# Altium PCB DartBoard.PcbDoc
Units mm, origin at the board's own origin, x right, y up, seen from the top; angles counter-clockwise.
Board outline 42.5 x 45 mm, 2 copper layers (Top Layer, Bottom Layer); 59 components, 37 nets, 242 pads, 103 vias.
Unrouted connection lines stored in the file: 95.
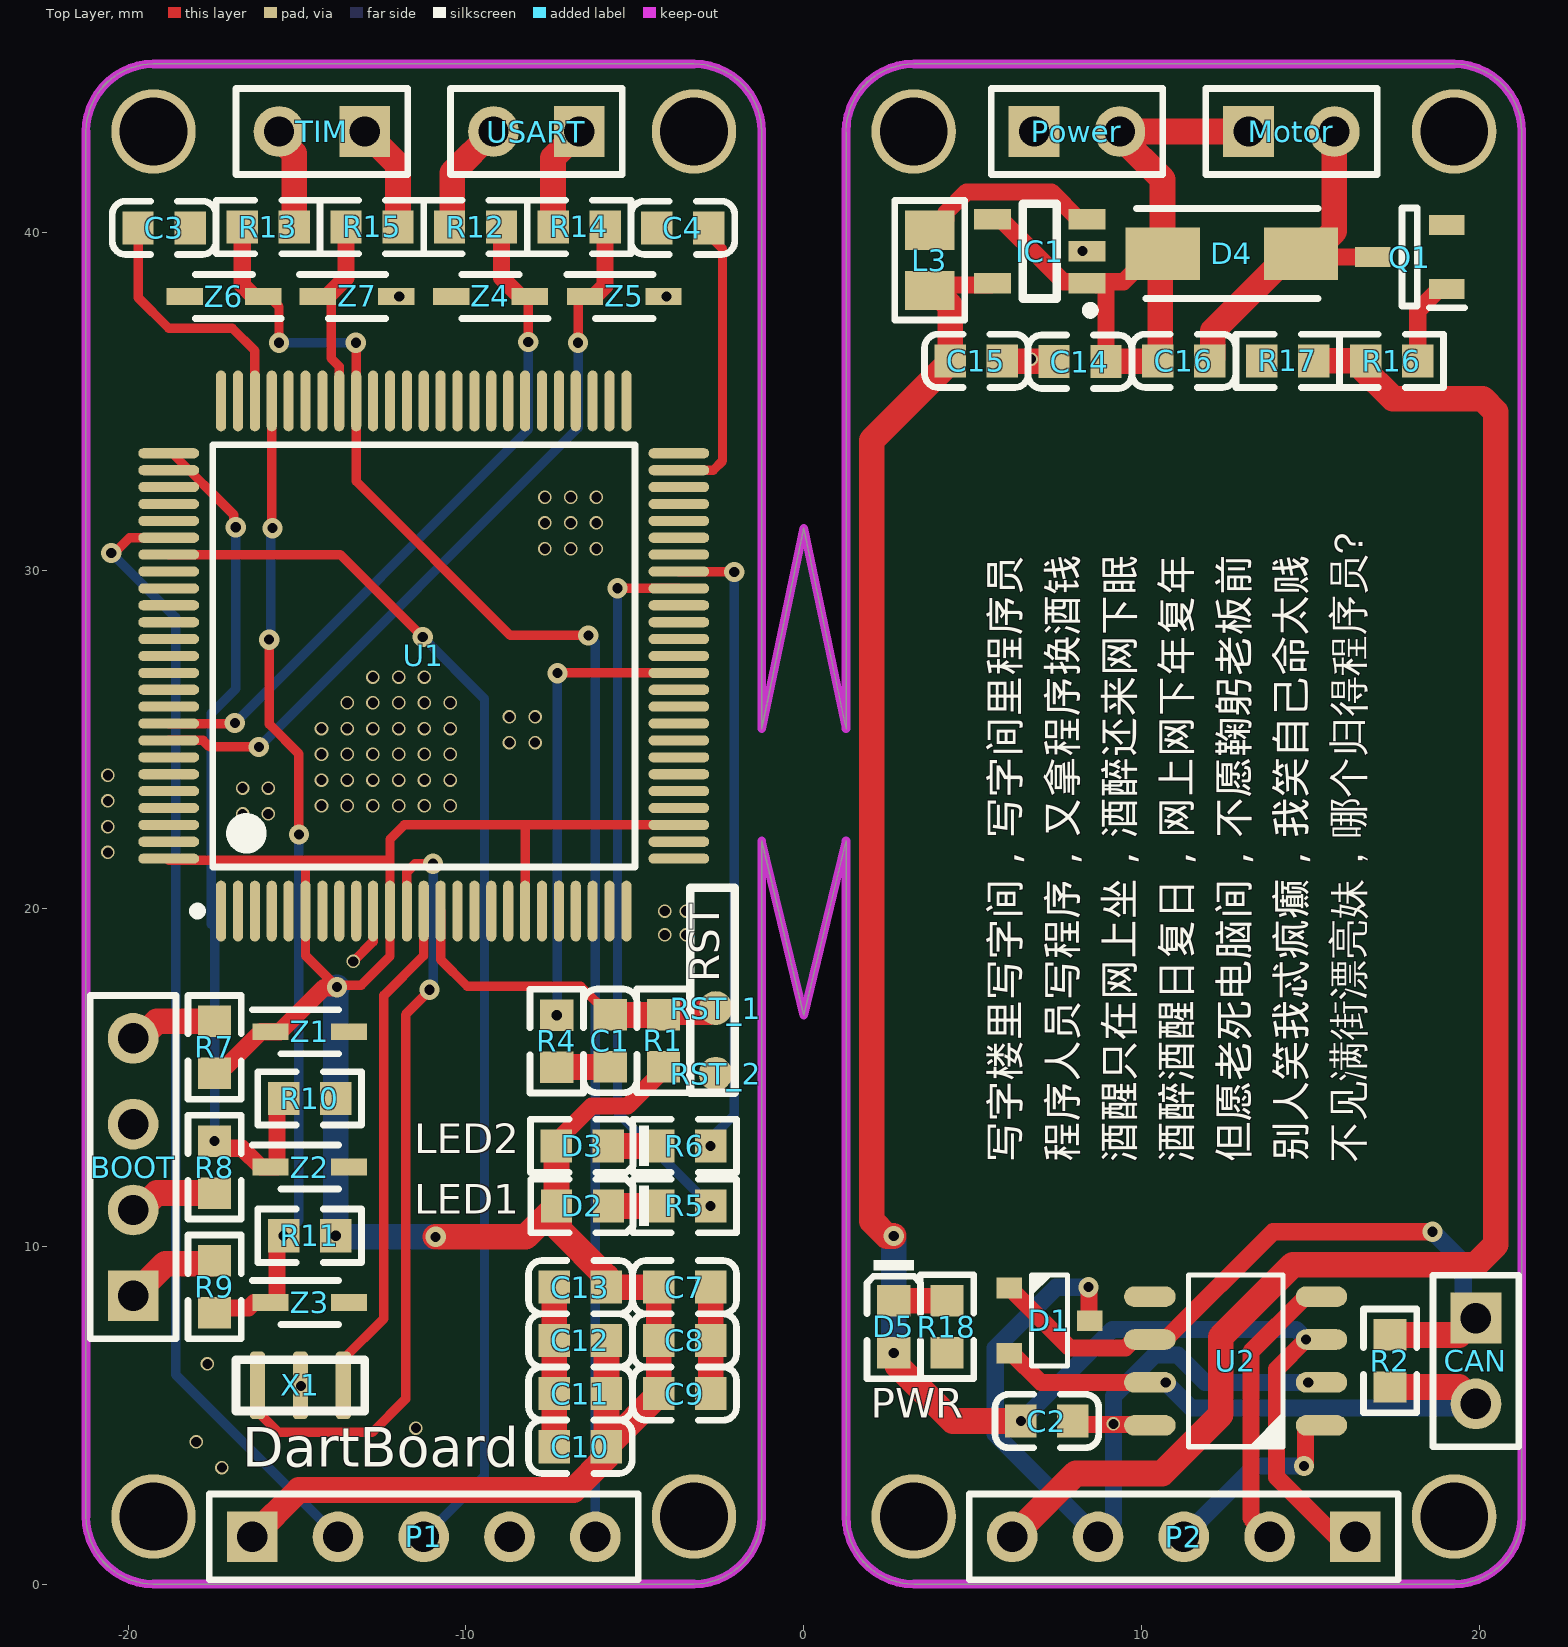
[diagram p0: Top Layer view]
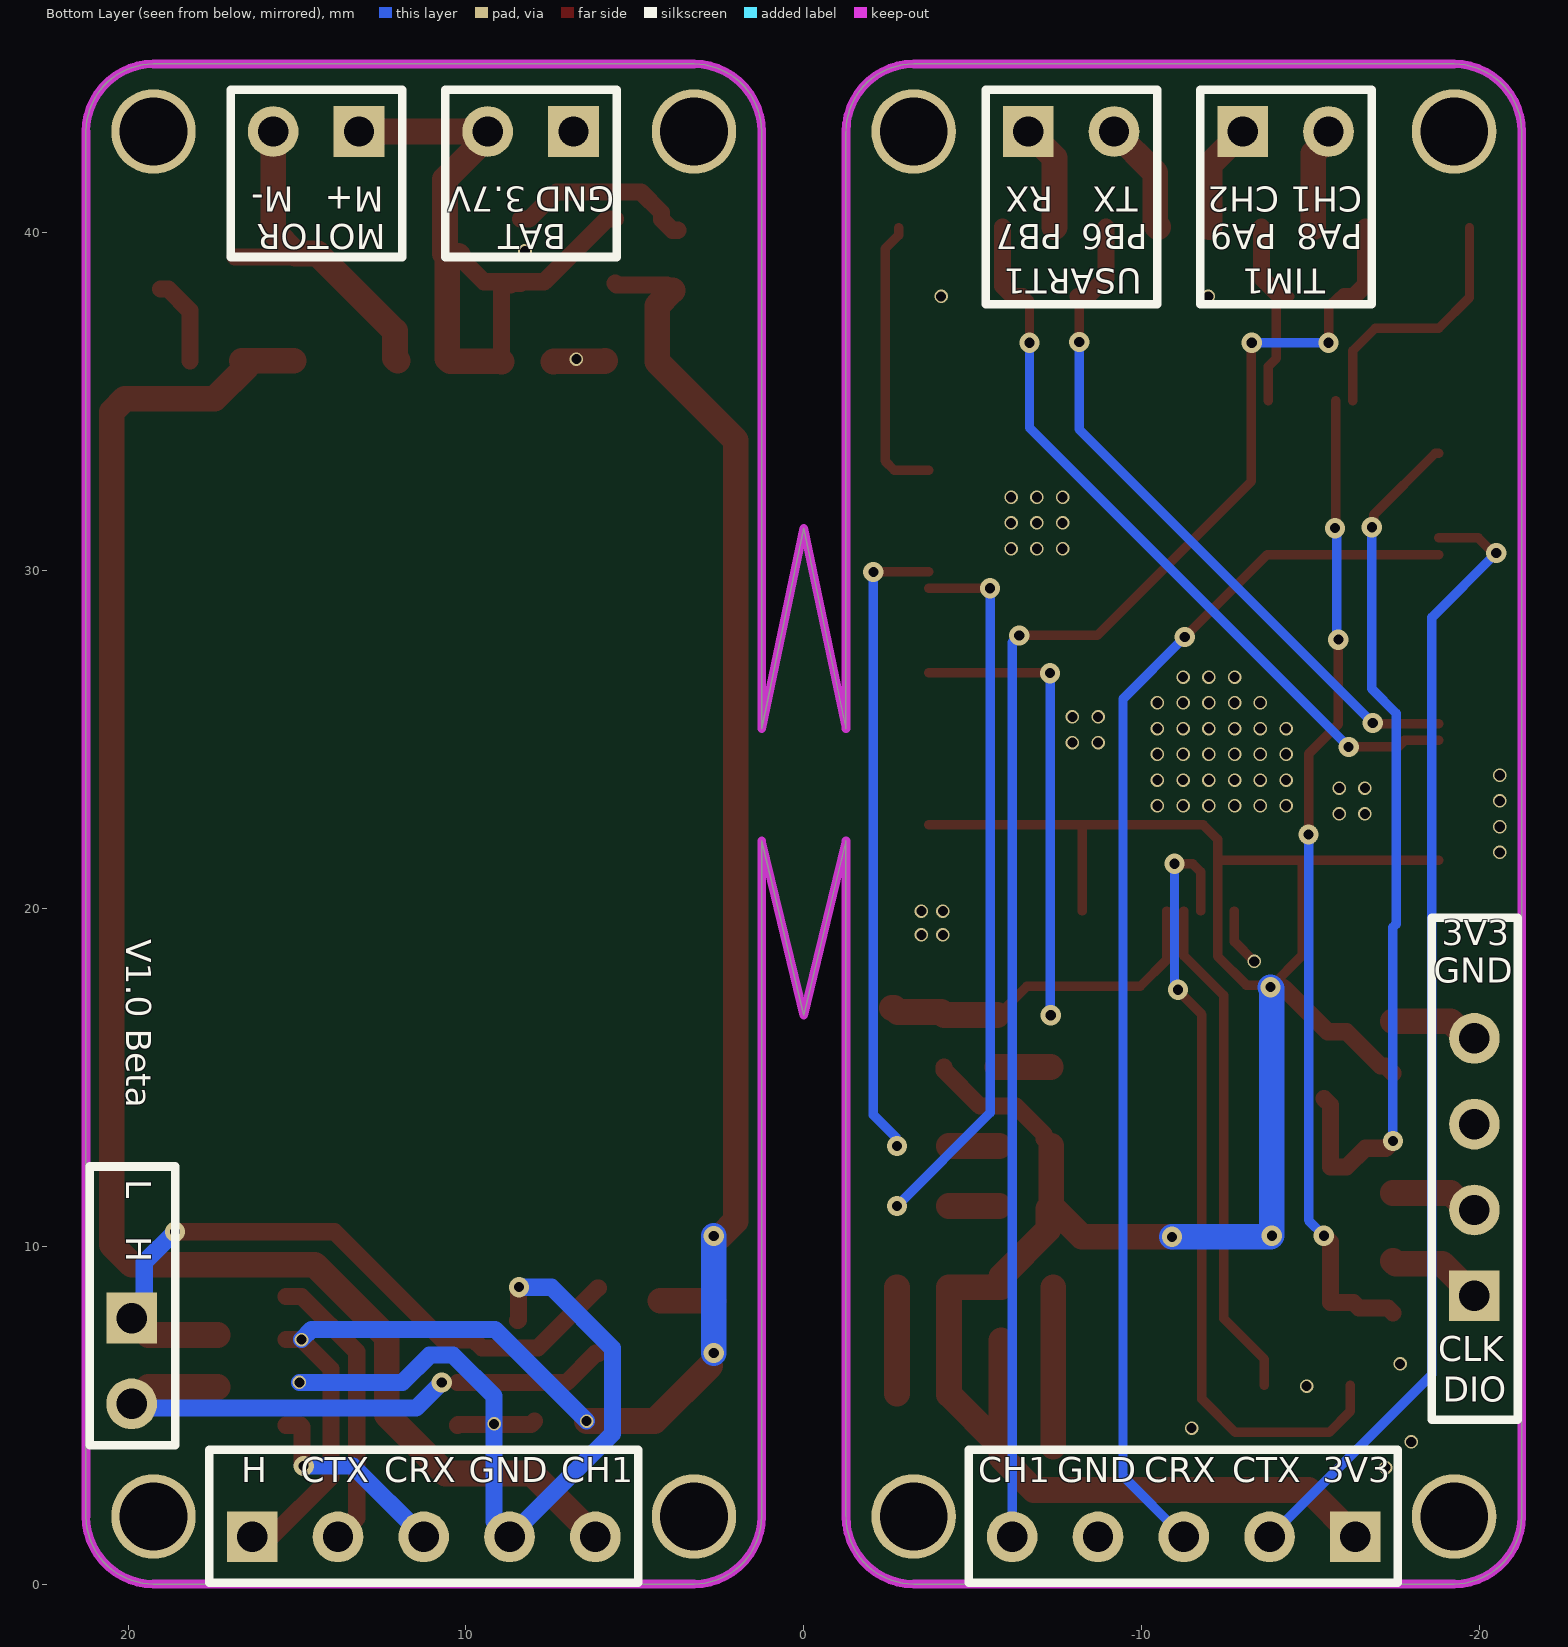
[diagram p1: Bottom Layer view, seen from below]
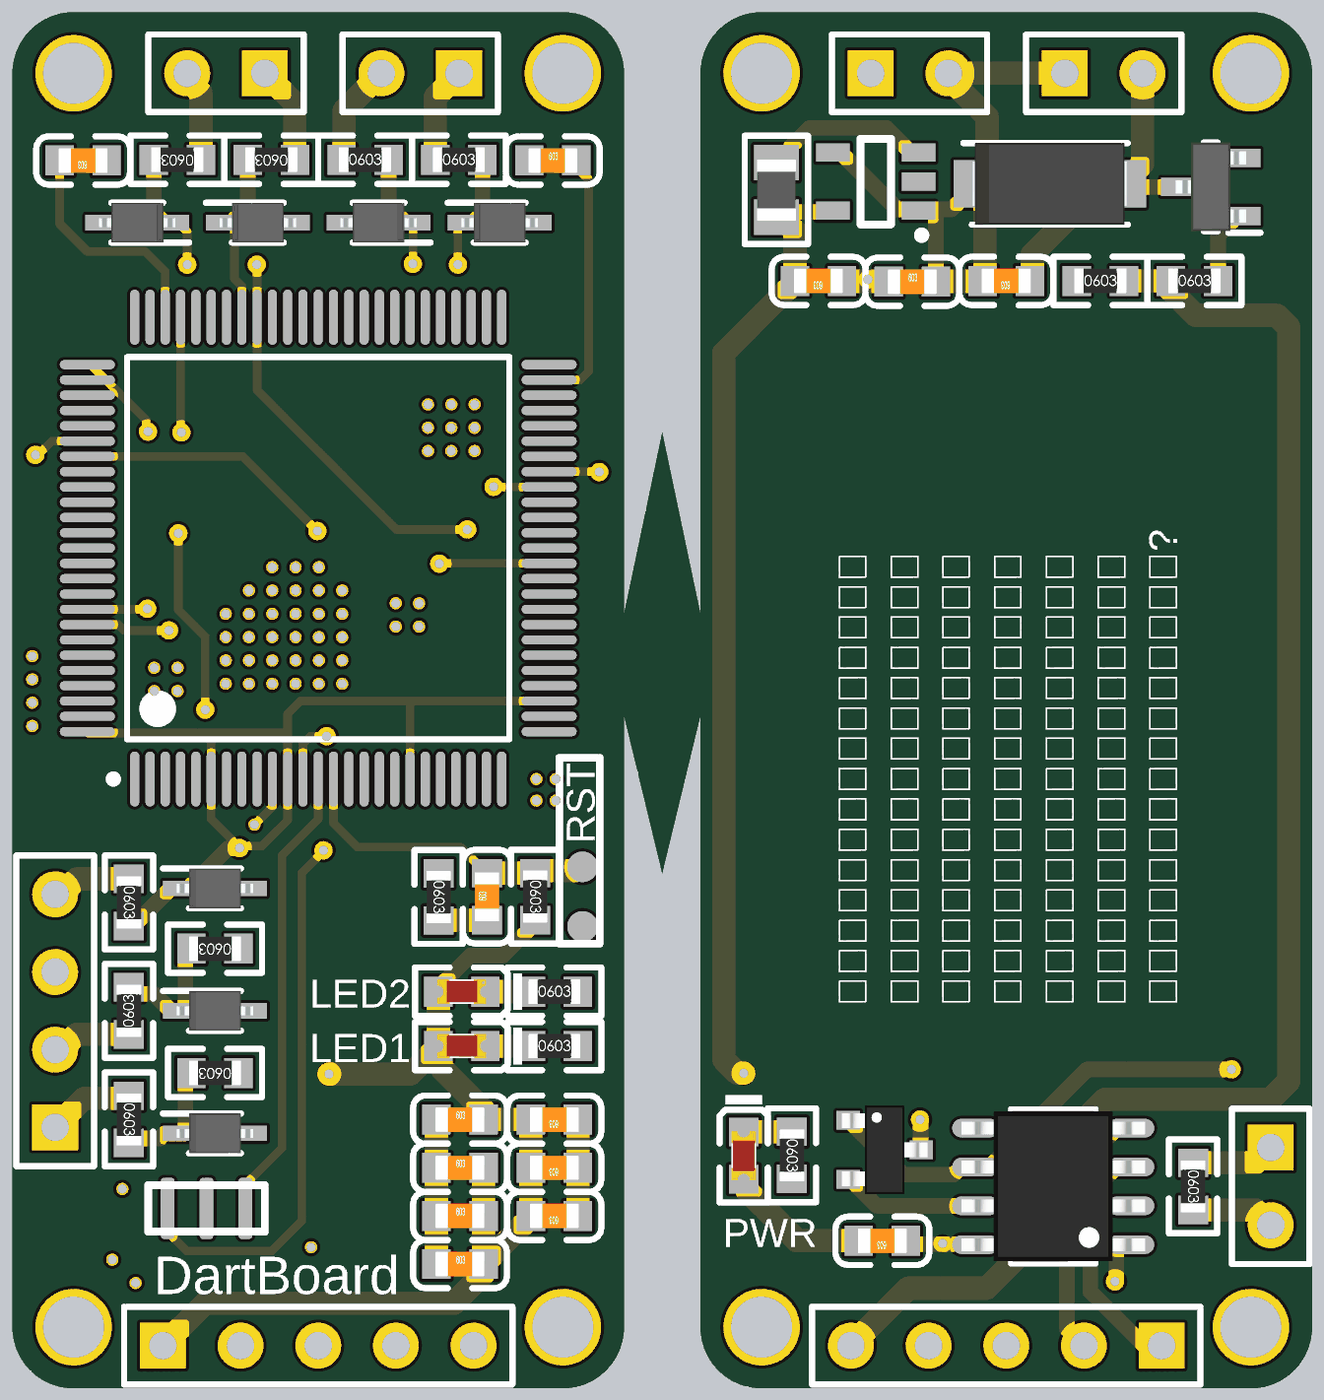
[diagram p2: 3D render of the assembled board from above, using the file's embedded part models]

## Layer stack, top to bottom
Top Solder: solder mask 0.0102, Solder Resist, Dk 3.5
Top Layer: signal copper 0.0356
Dielectric 1: dielectric 0.32, FR-4, Dk 4.8
Bottom Layer: signal copper 0.0356
Bottom Solder: solder mask 0.0102, Solder Resist, Dk 3.5

## Board outline
-21.25,2 ccw(c-19.25,2) -19.25,0 -3.25,0 ccw(c-3.25,2) -1.25,2 -1.25,22 0,16.839 1.25,22 1.25,2 ccw(c3.25,2) 3.25,0 19.25,0 ccw(c19.25,2) 21.25,2 21.25,43 ccw(c19.25,43) 19.25,45 3.25,45 ccw(c3.25,43) 1.25,43 1.25,25.326 0,31.259 -1.25,25.326 -1.25,43 ccw(c-3.25,43) -3.25,45 -19.25,45 ccw(c-19.25,43) -21.25,43

## Design rules (kind name [scope] priority, off if disabled: settings)
Clearance [All] p1: gap=0.127 ignorepadtopadclearanceinfootprint=FALSE except(0: Arc-Hole Track-Hole SMDPad-Hole THPad-Hole Via-Hole Fill-Hole Poly-Hole Region-Hole Text-Hole)
PlaneConnect [All] p1: planeconnectstyle=Direct reliefexpansion=0.508 reliefentries=4 reliefconductorwidth=0.254 reliefairgap=0.254
PolygonConnect [All] p1: connectstyle=Direct reliefconductorwidth=0.254 reliefentries=4 polygonreliefangle="90 Angle" airgapwidth=0.254
RoutingVias [All] p1: holewidth=0.3 width=0.6 viastyle="Through Hole" minholewidth=0.3 minwidth=0.6 maxholewidth=0.3 maxwidth=0.6
SolderMaskExpansion [All] p1: expansion=0.102
Width [All] p1: maxlimit=2.54 minlimit=0.254 preferedwidth=0.279
29 further rules are at their usual default settings.

## Components (designator, comment, footprint, x,y, rotation, side; value= is the part's Value field where it differs from the comment)
BOOT "Header 4" HDR1X4 -19.853,8.534 r90 top
C1 "100nF (104) 10% 50V" 0603_C -5.731,16.078 r90 top
C2 "100nF (104) 10% 50V" 0603_C 7.198,4.826 r180 top
C3 "2.2uF (225) 10% 16V" 0603_C -18.938,40.149 r180 top
C4 "2.2uF (225) 10% 16V" 0603_C -3.579,40.149 r0 top
C7 "100nF (104) 10% 50V" 0603_C -3.527,8.788 r180 top
C8 "100nF (104) 10% 50V" 0603_C -3.527,7.214 r180 top
C9 "100nF (104) 10% 50V" 0603_C -3.527,5.639 r180 top
C10 "100nF (104) 10% 50V" 0603_C -6.613,4.064 r0 top
C11 "100nF (104) 10% 50V" 0603_C -6.613,5.639 r0 top
C12 "100nF (104) 10% 50V" 0603_C -6.613,7.214 r0 top
C13 "100nF (104) 10% 50V" 0603_C -6.613,8.788 r0 top
C14 "4.7uF (475) 10% 16V" 0603_C 8.177,36.186 r0 top
C15 "10uF (106) 10% 10V" 0603_C 5.111,36.212 r180 top
C16 "10uF (106) 10% 10V" 0603_C 11.25,36.212 r180 top
CAN "Header 2" HDR1X2 19.898,7.874 r270 top
D1 "PESD2CAN" SOT-23-3 7.274,7.798 r180 top
D2 "红灯 0603" 0603_LED_S1 -6.551,11.193 r180 top
D3 "绿灯 0603" 0603_LED_S1 -6.554,12.971 r180 top
D4 "SS14-E3_61T" DIOM5127X229N 12.672,39.387 r0 top
D5 "红灯 0603" 0603_LED_S1 2.665,7.611 r270 top
IC1 "XM5062_33" SOT-23-5 6.983,39.457 r0 top
L3 "2.2uH ±10%" 0805_L 3.732,39.187 r270 top
Motor "Header 2" HDR1X2 13.167,43 r0 top
P1 "Header 5" HDR1X5 -16.33,1.397 r0 top
P2 "Header 5" HDR1X5 16.33,1.397 r180 top
Power "Header 2" HDR1X2 6.817,43 r0 top
Q1 "SI2302DS" SOT95P230X110-3N 17.938,39.285 r180 top
R1 "10KΩ (1002) ±1%" 0603_R -4.156,16.078 r270 top
R2 "120Ω (1200) ±1%" 0603_R 17.358,6.604 r270 top
R4 "10KΩ (1002) ±1%" 0603_R -7.313,16.069 r270 top
R5 "4.7KΩ (4701) ±1%" 0603_R -3.527,11.193 r0 top
R6 "4.7KΩ (4701) ±1%" 0603_R -3.527,12.971 r0 top
R7 "0Ω (0R0) ±1%" 0603_R -17.44,15.889 r270 top
R8 "100Ω (1000) ±1%" 0603_R -17.44,12.344 r90 top
R9 "100Ω (1000) ±1%" 0603_R -17.44,8.796 r270 top
R10 "10KΩ (1002) ±1%" 0603_R -14.627,14.376 r180 top
R11 "10KΩ (1002) ±1%" 0603_R -14.627,10.312 r180 top
R12 "100Ω (1000) ±1%" 0603_R -9.718,40.174 r0 top
R13 "100Ω (1000) ±1%" 0603_R -15.855,40.174 r180 top
R14 "100Ω (1000) ±1%" 0603_R -6.653,40.174 r0 top
R15 "100Ω (1000) ±1%" 0603_R -12.782,40.174 r180 top
R16 "22Ω (22R0) ±1%" 0603_R 17.405,36.212 r0 top
R17 "10KΩ (1002) ±1%" 0603_R 14.328,36.212 r0 top
R18 "4.7KΩ (4701) ±1%" 0603_R 4.24,7.62 r270 top
RST_1 "TestPoint" TestPoint -2.606,17.053 r90 top
RST_2 "TestPoint" TestPoint -2.606,15.104 r90 top
TIM "Header 2" HDR1X2 -12.995,43 r180 top
U1 "STM32F427VIT6" STM-LQFP100_N -11.25,27.474 r90 top
U2 "SN65HVD230DR" SOIC_8 12.786,6.604 r90 top
USART "Header 2" HDR1X2 -6.645,43 r180 top
X1 "12MHz" CSTCE_G(A)村田晶振 -14.903,5.884 r180 top
Z1 "BZT52C3V9S-7-F" SOD2513X110N -14.627,16.349 r0 top
Z2 "BZT52C3V9S-7-F" SOD2513X110N -14.627,12.344 r0 top
Z3 "BZT52C3V9S-7-F" SOD2513X110N -14.627,8.336 r0 top
Z4 "BZT52C3V9S-7-F" SOD2513X110N -9.275,38.117 r180 top
Z5 "BZT52C3V9S-7-F" SOD2513X110N -5.317,38.117 r0 top
Z6 "BZT52C3V9S-7-F" SOD2513X110N -17.166,38.117 r180 top
Z7 "BZT52C3V9S-7-F" SOD2513X110N -13.225,38.117 r0 top

## Footprints (in the part's own frame and the unit in brackets; to place one, negate y for a bottom-side part, rotate by r counter-clockwise, add the part's x,y. Pads: shape width x height; smd on the part's side, far side on the other; paste and mask are expansions set on the pad)
0603_C [mm]
  rect 0.93x0.98 smd: 1(-0.77,0) 2(0.77,0)
  silkscreen extent -1.53,-0.79 1.54,0.79, body extent -0.8,-0.4 0.8,0.4, height 0.3
0603_LED_S1 [mm]
  rect 0.93x0.98 smd: A(0.77,0) K(-0.77,0)
  silkscreen extent -1.98,-0.79 1.54,0.79, body extent -0.8,-0.4 0.8,0.4, height 0.6
0603_R [mm]
  rect 0.93x0.98 smd: 1(-0.77,0) 2(0.77,0)
  silkscreen extent -1.53,-0.79 1.54,0.79, body extent -0.85,-0.4 0.85,0.4, height 0.56
0805_L [mm]
  rect 1.16x1.47 smd: 1(-0.89,0) 2(0.89,0)
  silkscreen extent -1.77,-1.04 1.77,1.03, body extent -1.02,-0.64 1.03,0.64, height 0.6
CSTCE_G(A)村田晶振 [mm]
  rrect50% 0.45x2 smd: 1(1.27,0) 2(0,0) 3(-1.27,0)
  silkscreen extent -1.91,-0.76 1.91,0.76, body extent -1.9,-0.8 1.9,0.8, height 1
DIOM5127X229N [mm]
  rect 2.2x1.55 smd: 1(-2.05,0) 2(2.05,0)
  silkscreen extent -2.83,-1.33 2.55,1.33, body extent -2.55,-1.33 2.55,1.33, height 2.29
HDR1X2 [mm] "Connector; Header; 2 Position"
  rect 1.5x1.5 hole 0.9: 1(0,0)
  round 1.5 hole 0.9: 2(2.54,0)
  silkscreen extent -1.27,-1.27 3.81,1.27
HDR1X4 [mm] "Connector; Header; 4 Position"
  rect 1.5x1.5 hole 0.9: 1(0,0)
  round 1.5 hole 0.9: 2(2.54,0) 3(5.08,0) 4(7.62,0)
  silkscreen extent -1.27,-1.27 8.89,1.27
HDR1X5 [mm] "Connector; Header; 5 Position"
  rect 1.5x1.5 hole 0.9: 1(0,0)
  round 1.5 hole 0.9: 2(2.54,0) 3(5.08,0) 4(7.62,0) 5(10.16,0)
  silkscreen extent -1.27,-1.27 11.43,1.27
SOD2513X110N [mm]
  rect 1.075x0.5 smd: 1(-1.162,0) 2(1.162,0)
  silkscreen extent -1.7,-0.65 0.85,0.65, body extent -1.25,-0.65 1.25,0.65, height 1.1
SOIC_8 [mil]
  oval 24x60 smd: 1(-75,-100.02) 2(-25,-100.02) 3(25,-100.02) 4(75,-100.02) 5(75,99.98) 6(25,99.98) 7(-25,99.98) 8(-75,99.98)
  silkscreen extent -100,-55 100,55, body extent -96,-118 96,118, height 69
SOT95P230X110-3N [mm]
  rect 1.05x0.6 smd: 1(-1.1,0.95) 2(-1.1,-0.95) 3(1.1,0)
  silkscreen extent -1.63,-1.45 0.23,1.5, body extent -1.15,-1.45 1.15,1.45, height 1.1
SOT-23-3 [mil]
  rect 30x24 smd: 1(47,-38) 2(47,38) 3(-47,0)
  silkscreen extent -21,-53 21,53, body extent -55,-57 55,57, height 51
SOT-23-5 [mm]
  rect 1.1x0.6 smd: 1(1.4,-0.95) 2(1.4,0) 3(1.4,0.95) 4(-1.4,0.95) 5(-1.4,-0.95)
  silkscreen extent -0.5,-1.87 1.63,1.4
STM-LQFP100_N [mm] "Thin QFP, 100-Leads, Body 14x14mm, Pitch 0.5mm, IPC Medium Density"
  oval 1.8x0.3 smd: 1(-7.55,6) 2(-7.55,5.5) 3(-7.55,5) 4(-7.55,4.5) 5(-7.55,4) 6(-7.55,3.5) 7(-7.55,3) 8(-7.55,2.5) 9(-7.55,2) 10(-7.55,1.5) 11(-7.55,1) 12(-7.55,0.5) 13(-7.55,0) 14(-7.55,-0.5) 15(-7.55,-1) 16(-7.55,-1.5) 17(-7.55,-2) 18(-7.55,-2.5) 19(-7.55,-3) 20(-7.55,-3.5) 21(-7.55,-4) 22(-7.55,-4.5) 23(-7.55,-5) 24(-7.55,-5.5) 25(-7.55,-6) 51(7.55,-6) 52(7.55,-5.5) 53(7.55,-5) 54(7.55,-4.5) 55(7.55,-4) 56(7.55,-3.5) 57(7.55,-3) 58(7.55,-2.5) 59(7.55,-2) 60(7.55,-1.5) 61(7.55,-1) 62(7.55,-0.5) 63(7.55,0) 64(7.55,0.5) 65(7.55,1) 66(7.55,1.5) 67(7.55,2) 68(7.55,2.5) 69(7.55,3) 70(7.55,3.5) 71(7.55,4) 72(7.55,4.5) 73(7.55,5) 74(7.55,5.5) 75(7.55,6)
  oval 0.3x1.8 smd: 26(-6,-7.55) 27(-5.5,-7.55) 28(-5,-7.55) 29(-4.5,-7.55) 30(-4,-7.55) 31(-3.5,-7.55) 32(-3,-7.55) 33(-2.5,-7.55) 34(-2,-7.55) 35(-1.5,-7.55) 36(-1,-7.55) 37(-0.5,-7.55) 38(0,-7.55) 39(0.5,-7.55) 40(1,-7.55) 41(1.5,-7.55) 42(2,-7.55) 43(2.5,-7.55) 44(3,-7.55) 45(3.5,-7.55) 46(4,-7.55) 47(4.5,-7.55) 48(5,-7.55) 49(5.5,-7.55) 50(6,-7.55) 76(6,7.55) 77(5.5,7.55) 78(5,7.55) 79(4.5,7.55) 80(4,7.55) 81(3.5,7.55) 82(3,7.55) 83(2.5,7.55) 84(2,7.55) 85(1.5,7.55) 86(1,7.55) 87(0.5,7.55) 88(0,7.55) 89(-0.5,7.55) 90(-1,7.55) 91(-1.5,7.55) 92(-2,7.55) 93(-2.5,7.55) 94(-3,7.55) 95(-3.5,7.55) 96(-4,7.55) 97(-4.5,7.55) 98(-5,7.55) 99(-5.5,7.55) 100(-6,7.55)
  silkscreen extent -7.67,-6.25 6.25,6.82, body extent -7,-7 7,7, height 1.6
TestPoint [mm]
  round 1 smd: 1(0,0)

## Part data
BOOT: "Header, 4-Pin", LatestRevisionDate=17-Jul-2002, LatestRevisionNote="Re-released for DXP Platform.", Publisher="Altium Limited"
C1 C2 C7 C8 C9 C10 C11 C12 C13: library part "0603 100nF (104) 10% 50V", "贴片电容", Package=0603, SuppliersPartNumber=C14663, ComponentLink1Description=供应商, ComponentLink1URL=http://www.szlcsc.com/product/details_15331.html, Supplier=LC
C3 C4: library part "0603 2.2uF (225) 10% 16V", "贴片电容", Package=0603, SuppliersPartNumber=C23630, ComponentLink1Description=供应商, ComponentLink1URL=http://www.szlcsc.com/product/details_24366.html, Supplier=LC
C14: library part "0603 4.7uF (475) 10% 16V", "贴片电容", Package=0603, SuppliersPartNumber=C19666, ComponentLink1Description=供应商, ComponentLink1URL=http://www.szlcsc.com/product/details_20375.html, Supplier=LC
C15 C16: library part "0603 10uF (106) 10% 10V", "贴片电容", Package=0603, SuppliersPartNumber=C19702, ComponentLink1Description=供应商, ComponentLink1URL=http://www.szlcsc.com/product/details_20411.html, Supplier=LC
CAN Motor Power TIM USART: "Header, 2-Pin", LatestRevisionDate=17-Jul-2002, LatestRevisionNote="Re-released for DXP Platform.", Publisher="Altium Limited"
D1: library part TVS_C2
D2 D5: library part "0603 红灯", "发光二极管", Package=0603, SuppliersPartNumber=C2286, ComponentLink1Description=供应商, ComponentLink1URL=http://www.szlcsc.com/product/details_2659.html, Supplier=LC
D3: library part "0603 绿灯", "发光二极管", Package=0603, SuppliersPartNumber=C72043, ComponentLink1Description=供应商, ComponentLink1URL=http://www.szlcsc.com/product/details_73152.html, Supplier=LC
D4: "Diode", Manufacturer_Name=Vishay, Manufacturer_Part_Number=SS14-E3/61T, Mouser Part Number=625-SS14-E3, RS Part Number=6387915P, Allied_Number=70217666, Allied Price/Stock=https://www.alliedelec.com/general-semiconductor-vishay-ss14-e3-61t/70217666/, Datasheet Link=http://docs-emea.rs-online.com/webdocs/0928/0900766b809284de.pdf, Height=2.29mm, Mouser Price/Stock=https://www.mouser.com/Search/Refine.aspx?Keyword=625-SS14-E3, RS Price/Stock=http://uk.rs-online.com/web/p/products/6387915P
IC1: library part 1-1393258-5, "Relay or Contactor", Manufacturer_Name="TE Connectivity", Datasheet Link=http://www.te.com/commerce/DocumentDelivery/DDEController?Action=showdoc&DocId=Data+Sheet%7FSR2M%7F1116%7Fpdf%7FEnglish%7FENG_DS_SR2M_1116.pdf%7F1-1393258-5, Height=25mm, Manufacturer_Part_Number=1-1393258-5
L3: library part "0805 2.2uH 10%", "贴片电感", Package=0805, SuppliersPartNumber=C1043, ComponentLink1Description=供应商, ComponentLink1URL=http://www.szlcsc.com/product/details_1395.html, Supplier=LC
P1 P2: "Header, 5-Pin", LatestRevisionDate=17-Jul-2002, LatestRevisionNote="Re-released for DXP Platform.", Publisher="Altium Limited"
Q1: "MOSFET (N-Channel)", Manufacturer_Name=Nexperia, Mouser Part Number=N/A, RS Part Number=7983053P, Datasheet Link=https://assets.nexperia.com/documents/data-sheet/SI2302DS.pdf, Height=1.1mm, Manufacturer_Part_Number=SI2302DS, Mouser Price/Stock=https://www.mouser.com/Search/Refine.aspx?Keyword=N%2FA, RS Price/Stock=http://uk.rs-online.com/web/p/products/7983053P
R1 R4 R10 R11 R17: library part "0603 10KΩ (1002) 1%", "贴片电阻", Package=0603, SuppliersPartNumber=C25804, ComponentLink1Description=供应商, ComponentLink1URL=http://www.szlcsc.com/product/details_26547.html, Supplier=LC
R2: library part "0603 120Ω (1200) 1%", "贴片电阻", Package=0603, SuppliersPartNumber=C22787, ComponentLink1Description=供应商, ComponentLink1URL=http://www.szlcsc.com/product/details_23514.html, Supplier=LC
R5 R6 R18: library part "0603 4.7KΩ (4701) 1%", "贴片电阻", Package=0603, SuppliersPartNumber=C23162, ComponentLink1Description=供应商, ComponentLink1URL=http://www.szlcsc.com/product/details_23889.html, Supplier=LC
R7: library part "0603 0Ω (0R0) 1%", "贴片电阻", Package=0603, SuppliersPartNumber=C21189, ComponentLink1Description=供应商, ComponentLink1URL=http://www.szlcsc.com/product/details_21903.html, Supplier=LC
R8 R9 R12 R13 R14 R15: library part "0603 100Ω (1000) 1%", "贴片电阻", Package=0603, SuppliersPartNumber=C22775, ComponentLink1Description=供应商, ComponentLink1URL=http://www.szlcsc.com/product/details_23502.html, Supplier=LC
R16: library part "0603 22Ω (22R0) 1%", "贴片电阻", Package=0603, SuppliersPartNumber=C23345, ComponentLink1Description=供应商, ComponentLink1URL=http://www.szlcsc.com/product/details_24078.html, Supplier=LC
U1: "ARM Cortex-M4 32-bit MCU+FPU, 210 DMIPS, 2048 kB Flash, 256 kB Internal RAM, 82 I/Os, 100-pin LQFP, -40 to 85 degC, Tray", I/Os (High Current)=82, Manufacturer=STMicroelectronics, Operating Frequency(F) (Processor speed) (MHz)=168, Supplier Part Number 1=497-14049-ND, Supply Voltage(Vcc) max (V)=3.6, Supply Voltage(Vcc) min (V)=1.8, ComponentLink1Description="Manufacturer URL", ComponentLink1URL=http://www.st.com/web/en/home.html, ComponentLink2Description=Datasheet, ComponentLink2URL=http://www.st.com/st-web-ui/static/active/en/resource/technical/document/datasheet/DM00071990.pdf, ComponentLink3Description="Package Specification", ComponentLink3URL=http://www.st.com/st-web-ui/static/active/en/resource/technical/document/data_brief/DM00071938.pdf, Core="ARM Cortex-M4", D/A Converter=2x12-bit, DatasheetVersion="Rev. 1", FLASH Size (Prog) (kB)=2048, Internal RAM Size (kB)=256, Mounting Technology="Surface Mount", PackageDescription="100-Pin Low Profile Quad Flat Package, 14 x 14 mm Body, 0.5 mm Pitch", PackageReference=LQFP100, PackageVersion="Rev. 1, 06/2013", Packing=Tray, PartNumber=STM32F427VIT6, Supplier 1=Digi-Key, Supplier 2=Farnell, Supplier 3=Newark, Supplier 4=Newark, Supplier 5=Mouser, Supplier Part Number 2=2333369, Supplier Part Number 3=99W9927, Supplier Part Number 4=66W7312, Supplier Part Number 5=511-STM32F427VIT6
U2: "CANоƬ"
X1: library part XTAL-3215
Z1 Z2 Z3 Z4 Z5 Z6 Z7: "Zener Diode", Manufacturer_Name="Diodes Inc.", Mouser Part Number=621-BZT52C3V9S-F, RS Part Number=7513761, Allied_Number=70437795, Allied Price/Stock=https://www.alliedelec.com/diodes-inc-bzt52c3v9s-7-f/70437795/, Datasheet Link=https://www.diodes.com/assets/Datasheets/ds30093.pdf, Height=1.1mm, Manufacturer_Part_Number=BZT52C3V9S-7-F, Mouser Price/Stock=https://www.mouser.com/Search/Refine.aspx?Keyword=621-BZT52C3V9S-F, RS Price/Stock=https://uk.rs-online.com/web/p/products/7513761

## Free pads (board coordinates)
  round 2.5 hole 2: 9(-19.25,2) 9(-19.25,43) 9(-3.25,2) 9(-3.25,43) 9(3.25,2) 9(3.25,43) 9(19.25,2) 9(19.25,43)

## Via types
v1: diameter 0.4, hole 0.3, Top Layer to Bottom Layer, 71 vias
v2: diameter 0.6, hole 0.3, Top Layer to Bottom Layer, 32 vias

## Nets (pads, with @x,y where several pads share a name; then routed paths per layer and width w, separated by ;. In a path a pad name is that pad's centre, name@x,y a point inside that pad or via, vN(x,y) a via of type N, cw(c..) or ccw(c..) an arc to the next point about the centre after c; other vN are vias at no path point)
BOOT0: U1.94
BOOT1: R4.1 U1.37 | length 13.7
  Top Layer w0.279: v2(-7.292,26.966) -7.284,26.974 U1.37
  Bottom Layer w0.279: v2(-7.313,16.839) -7.302,16.85 -7.302,26.956 v2(-7.292,26.966)
CAN1_H: CAN.2 D1.2 R2.2 U2.7 | length 16.8
  Top Layer w0.508: D1.2 6.157,6.833 7.02,5.969 U2.7
  Top Layer w0.762: R2.2 19.398,5.834 CAN.2
  Bottom Layer w0.508: v2(10.717,5.969) 11.479,5.207 19.771,5.207 CAN.2
CAN1_L: CAN.1 D1.1 R2.1 U2.6 | length 20.5
  Top Layer w0.508: D1.1 6.099,8.763 7.877,6.985 9.523,6.985 9.757,7.22 10.227,7.22 U2.6 10.704,7.239 13.895,10.431 v2(18.616,10.431)
  Top Layer w0.762: R2.1 19.398,7.374 CAN.1
  Bottom Layer w0.508: v2(18.616,10.431) 19.523,9.524 19.523,8.249 CAN.1
CAN1_RX(PD0): P1.2 P2.2 U1.81 U2.4 | length 42.3
  Top Layer w0.279: v2(-20.5,30.522) -20.413,30.522 -19.961,30.974 U1.81
  Top Layer w0.508: P2.2 13.236,1.951 13.236,6.876 14.869,8.509 U2.4
  Bottom Layer w0.279: v2(-20.5,30.522) -18.595,28.617 -18.595,6.202 P1.2
CAN1_TX(PD1): P1.3 P2.3 U1.82 U2.1 | length 42.8
  Top Layer w0.279: U1.82 -13.721,30.474 v2(-11.28,28.033)
  Top Layer w0.508: v2(14.806,3.496) 14.85,3.54 14.85,4.652 14.897,4.699 U2.1
  Bottom Layer w0.279: v2(-11.28,28.033) -9.451,26.204 -9.451,3.196 P1.3
  Bottom Layer w0.508: P2.3 13.349,3.496 v2(14.806,3.496)
GND: BOOT.3 C1.1 C2.1 C3.1 C4.1 C7.1 C8.1 C9.1 C10.1 C11.1 C12.1 C13.1 C14.1 C15.1 D1.3 IC1.2 P1.4 P2.4 Power.1 Q1.2 R4.2 R10.1 R17.1 R18.2 RST_2.1 U1.10 U1.27 U1.74 U1.99 U2.2 U2.8 X1.2 Z1.2 Z2.2 Z3.2 Z4.2 Z5.2 Z6.2 Z7.2 | length 37.4
  Top Layer w0.279: v1(-13.337,18.432) -12.75,19.019 U1.10
  Top Layer w0.508: C2.1 8.075,4.719 10.227,4.719 U2.8 ; v2(8.431,8.788) 8.448,8.771 8.448,7.818 D1.3
  Top Layer w0.762: C10.1 C11.1 C12.1 C13.1 ; R4.2 -7.309,15.304 -5.735,15.304 C1.1 ; C9.1 C8.1 C7.1 ; C15.1 5.894,36.199 7.394,36.199 C14.1
  Bottom Layer w0.508: v2(8.431,8.788) 7.471,8.788 5.666,6.983 5.666,4.441 P2.4 9.167,1.854 v1(9.167,4.741) 9.167,5.562 10.382,6.777 11.077,6.777 11.885,5.969 v1(14.933,5.969)
  other v1: -17.223,3.446 -17.985,4.208 -11.483,4.614 -14.887,5.859 -17.655,6.519 -4.117,19.219 -3.482,19.219 -4.117,19.924 -3.482,19.924 -20.602,21.657 -20.602,22.419 -16.614,22.8 -15.852,22.8 -14.277,23.04 -13.515,23.04 -12.753,23.04 -11.991,23.04 -11.229,23.04 -10.467,23.04 -20.602,23.181 -16.614,23.562 -15.852,23.562 -14.277,23.802 -13.515,23.802 -12.753,23.802 -11.991,23.802 -11.229,23.802 -10.467,23.802 -20.602,23.943 -14.277,24.564 -13.515,24.564 -12.753,24.564 -11.991,24.564 -11.229,24.564 -10.467,24.564 -8.714,24.909 -7.952,24.909 -14.277,25.326 -13.515,25.326 -12.753,25.326 -11.991,25.326 -11.229,25.326 -10.467,25.326 -8.714,25.671 -7.952,25.671 -13.515,26.088 -12.753,26.088 -11.991,26.088 -11.229,26.088 -10.467,26.088 -12.753,26.85 -11.991,26.85 -11.229,26.85 -7.661,30.649 -6.899,30.649 -6.137,30.649 -7.661,31.411 -6.899,31.411 -6.137,31.411 -7.661,32.173 -6.899,32.173 -6.137,32.173 6.729,36.262 -11.975,38.117 -4.067,38.117 8.253,39.463
LED1(PE11): R5.2 U1.42 | length 21.2
  Top Layer w0.279: v2(-5.514,29.481) -5.507,29.474 U1.42
  Bottom Layer w0.279: v2(-5.514,29.481) -5.514,13.949 v2(-2.757,11.193)
LED2(PE12): R6.2 U1.43 | length 18.9
  Top Layer w0.279: U1.43 -2.07,29.974 v2(-2.06,29.963)
  Bottom Layer w0.279: v2(-2.757,12.971) -2.757,13.187 -2.06,13.885 v2(-2.06,29.963)
NetBOOT_1: BOOT.1 R9.1 | length 2.8
  Top Layer w0.762: BOOT.1 -18.905,9.482 -17.524,9.482 R9.1
NetBOOT_2: BOOT.2 R8.1 | length 2.6
  Top Layer w0.762: BOOT.2 -19.653,11.074 -19.153,11.574 R8.1
NetBOOT_4: BOOT.4 R7.1 | length 2.6
  Top Layer w0.762: BOOT.4 -19.653,16.154 -19.148,16.659 R7.1
NetC3_2: C3.2 U1.73 | length 7.7
  Top Layer w0.279: C3.2 -19.708,38.087 -18.798,37.177 -16.919,37.177 -16.25,36.508 U1.73
NetC4_2: C4.2 U1.49 | length 8.5
  Top Layer w0.279: U1.49 -2.68,32.974 -2.406,33.248 -2.406,39.53 -2.809,39.933 C4.2
NetC16_1: C16.1 D4.2 Motor.2 Q1.3 | length 10.9
  Top Layer w0.508: D4.2 14.824,39.285 Q1.3
  Top Layer w0.762: C16.1 12.104,36.296 12.104,37.093 14.397,39.387 D4.2 15.047,39.387 15.707,40.046 Motor.2
NetD2_K: D2.K R5.1 | length 1.5
  Top Layer w0.762: D2.K R5.1
NetD3_K: D3.K R6.1 | length 1.5
  Top Layer w0.762: D3.K R6.1
NetD5_K: D5.K R18.1 | length 1.6
  Top Layer w0.762: D5.K 2.669,8.386 4.235,8.386 R18.1
NetIC1_3: IC1.3 L3.1 | length 5.6
  Top Layer w0.508: L3.1 3.887,40.077 4.213,40.403 4.213,40.605 4.822,41.215 7.325,41.215 8.133,40.407 IC1.3
NetQ1_1: Q1.1 R16.2 | length 2.6
  Top Layer w0.508: R16.2 18.175,37.697 18.813,38.335 Q1.1
NetR12_1: R12.1 USART.2 | length 3.4
  Top Layer w0.762: R12.1 -10.404,40.258 -10.404,41.781 USART.2
NetR13_1: R13.1 TIM.2 | length 3
  Top Layer w0.762: TIM.2 -15.535,42.8 -15.085,42.351 R13.1
NetR14_1: R14.1 USART.1 | length 3.1
  Top Layer w0.762: R14.1 -7.423,42.222 USART.1
NetR15_1: R15.1 TIM.1 | length 3.2
  Top Layer w0.762: TIM.1 -12.012,42.017 R15.1
NRST: C1.2 R1.1 RST_1.1 U1.14 | length 10.3
  Top Layer w0.279: U1.14 -10.75,18.487 -9.962,17.698 -6.606,17.698 -5.756,16.848 C1.2
  Top Layer w0.762: C1.2 R1.1 -4.072,16.932 -2.791,16.932 -2.671,17.053 RST_1.1
SWCLK: R8.2 R10.2 U1.76 Z2.1 | length 25.8
  Top Layer w0.279: U1.76 -18.694,33.474 -16.878,31.658 -16.878,31.345 v2(-16.817,31.284)
  Top Layer w0.508: R8.2@-17.377,13.05 -17.229,12.903 -16.628,12.903 -16.068,12.344 Z2.1 -15.597,12.344 -15.593,12.348 -15.593,14.18 R10.2
  Bottom Layer w0.279: v2(-17.44,13.114) -17.44,19.442 -17.536,19.538 -17.536,25.78 -16.817,26.499 v2(-16.817,31.284)
SWDIO: R9.2 R11.2 U1.72 Z3.1 | length 29.3
  Top Layer w0.279: v2(-15.826,27.957) -15.826,25.458 -14.945,24.576 v2(-14.945,22.191) ; U1.72 -15.75,31.284 v2(-15.725,31.259)
  Top Layer w0.508: R9.2 -17.296,8.17 -16.436,8.17 -16.27,8.336 Z3.1 -15.597,8.336 -15.593,8.34 -15.593,10.116 v2(-15.397,10.312)
  Bottom Layer w0.279: v2(-15.826,27.957) -15.776,28.007 -15.776,31.208 v2(-15.725,31.259) ; v2(-15.397,10.312) -14.945,10.764 v2(-14.945,22.191)
TIM1_CH1(PA8): P1.5 P2.5 R13.2 R16.1 R17.2 U1.67 Z6.1 | length 96.4
  Top Layer w0.279: Z6.1 -15.835,38.117 -15.535,37.817 v2(-15.535,36.745) ; v2(-13.261,36.745) -13.25,36.734 U1.67 -13.25,32.645 -8.689,28.084 v2(-6.378,28.084) v2@-6.378,28.152
  Top Layer w0.508: R13.2 -16.625,38.458 -16.284,38.117 Z6.1
  Top Layer w0.762: P2.5 8.049,3.276 10.609,3.276 12.347,5.013 12.347,6.35 12.347,7.316 14.48,9.449 19.895,9.449 20.488,10.042 20.488,34.695 20.097,35.087 17.447,35.087 16.478,36.055 R16.1 R17.2
  Bottom Layer w0.279: v2(-15.535,36.745) v2(-13.261,36.745) ; v2(-6.378,28.084) -6.17,27.876 P1.5
TIM1_CH2(PA9): R15.2 U1.68 Z7.1 | length 5.8
  Top Layer w0.279: Z7.1 -14.107,38.117 -14.099,38.117 -13.989,38.006 -13.989,36.282 -13.75,36.043 U1.68
  Top Layer w0.508: Z7.1@-14.107,38.117 -13.552,38.672 R15.2
USART1_RX(PB7): R14.2 U1.93 Z5.1 | length 22.6
  Top Layer w0.279: U1.93 -17.781,24.974 -17.589,24.782 v2(-16.131,24.782) ; v2(-6.682,36.745) -6.682,38.006 -6.572,38.117 Z5.1
  Top Layer w0.508: Z5.1 -6.2,38.117 -5.883,38.434 R14.2
  Bottom Layer w0.279: v2(-16.131,24.782) -6.682,34.23 v2(-6.682,36.745)
USART1_TX(PB6): R12.2 U1.92 Z4.1 | length 20.8
  Top Layer w0.279: U1.92 -16.861,25.474 v2(-16.842,25.493) ; v2(-8.156,36.77) -8.156,38.074 Z4.1
  Top Layer w0.508: R12.2 -8.948,38.672 -8.393,38.117 Z4.1
  Bottom Layer w0.279: v2(-16.842,25.493) -8.156,34.18 v2(-8.156,36.77)
VCC_3.7V: C14.2 C16.2 D4.1 IC1.1 IC1.4 Motor.1 Power.2 | length 21.6
  Top Layer w0.508: IC1.4 5.833,40.407 7.687,38.553 IC1.1@8.429,38.553 ; C14.2 8.947,38.461 8.679,38.461 8.633,38.507 IC1.1 IC1.1@8.429,38.553 ; D4.1@10.226,39.315 9.463,38.553 IC1.1@8.429,38.553
  Top Layer w0.762: C14.2 8.959,36.199 10.467,36.199 C16.2 10.551,36.283 10.551,39.315 D4.1@10.226,39.315 ; D4.1 10.622,41.588 9.357,42.854 Power.2 Motor.1
VCC_3V3_MCU: C2.2 C7.2 C8.2 C9.2 C10.2 C11.2 C12.2 C13.2 C15.2 D2.A D3.A D5.A IC1.5 L3.2 P1.1 P2.1 R1.2 R7.2 R11.1 U1.6 U1.11 U1.19 U1.28 U1.50 U1.75 U1.100 U2.3 Z1.1 | length 133.9
  Top Layer w0.279: U1.100@-18.8,21.43 -12.289,21.43 -12.25,21.469 ; -14.75,21.31 U1.6 -14.75,18.605 -13.837,17.692 v2@-13.837,17.67 ; v2@-13.837,17.652 v2(-13.82,17.67) -13.758,17.731 -13.103,17.731 -12.25,18.584 U1.11 -12.25,21.469 ; U1.19 -8.25,22.467 -8.257,22.474 ; U1.28 -8.257,22.474 ; -12.25,21.469 -12.25,22.049 -11.825,22.474 -8.257,22.474
  Top Layer w0.508: R7.2 -17.223,15.336 -17.082,15.336 -16.068,16.349 Z1.1 -15.51,16.349 -14.206,17.652 v2@-13.837,17.652 ; D3.A -7.113,13.182 -7.113,13.315 -6.276,14.152 -5.213,14.152 -4.156,15.21 R1.2 ; L3.2@3.887,38.297 4.051,38.461 5.537,38.461 IC1.5 ; U2.3 v1(14.869,7.239) 13.998,6.368 13.998,3.162 15.763,1.397 P2.1
  Top Layer w0.762: P1.1 -14.945,2.782 -6.812,2.782 -5.843,3.751 C10.2 C10.2@-5.843,4.089 ; v2(-10.899,10.278) -8.235,10.278 -7.43,11.084 -7.405,11.084 -7.321,11.168 D2.A ; D3.A -7.322,12.969 D2.A D2.A ; C12.2 C11.2 C10.2@-5.843,4.089 ; v2(2.665,10.304) 2.458,10.304 2.012,10.75 2.012,33.857 4.341,36.187 C15.2 4.339,36.214 4.339,37.845 L3.2@3.887,38.297 ; D5.A@2.774,6.463 4.411,4.826 v1(6.428,4.826) ; D2.A -7.237,11.109 -7.237,10.495 -5.843,9.101 C13.2 C7.2 C8.2 C9.2 -4.297,5.614 -5.738,4.173 -5.759,4.173 C10.2@-5.843,4.089
  Bottom Layer w0.508: v1(6.428,4.826) 9.141,7.539 14.569,7.539 v1(14.869,7.239)
  Bottom Layer w0.762: v2(-13.82,17.67) -13.857,17.632 v2(-13.857,10.312) -13.823,10.278 v2(-10.899,10.278) ; v2(2.665,6.841) v2(2.665,10.304)
VDDA_MCU: U1.21 U1.22
VSSA_MCU: U1.20
XTAL1: U1.12 X1.1 | length 24
  Top Layer w0.279: X1.1 -16.173,5.109 -15.554,4.49 -12.775,4.49 -11.788,5.478 -11.788,16.857 -11.077,17.568 v2(-11.077,17.593) ; U1.12 -11.75,21.084 -11.509,21.325 v2(-10.975,21.325)
  Bottom Layer w0.279: v2(-11.077,17.593) -10.975,17.695 v2(-10.975,21.325)
XTAL2: U1.13 X1.3 | length 15
  Top Layer w0.279: X1.3 -13.633,6.659 -12.431,7.861 -12.431,17.424 -11.25,18.605 U1.13
pads on no net: U1.1 U1.2 U1.3 U1.4 U1.5 U1.7 U1.8 U1.9 U1.15 U1.16 U1.17 U1.18 U1.23 U1.24 U1.25 U1.26 U1.29 U1.30 U1.31 U1.32 U1.33 U1.34 U1.35 U1.36 U1.38 U1.39 U1.40 U1.41 U1.44 U1.45 U1.46 U1.47 U1.48 U1.51 U1.52 U1.53 U1.54 U1.55 U1.56 U1.57 U1.58 U1.59 U1.60 U1.61 U1.62 U1.63 U1.64 U1.65 U1.66 U1.69 U1.70 U1.71 U1.77 U1.78 U1.79 U1.80 U1.83 U1.84 U1.85 U1.86 U1.87 U1.88 U1.89 U1.90 U1.91 U1.95 U1.96 U1.97 U1.98 U2.5

## Polygon pours and split planes (outlines as drawn)
GND on Bottom Layer "GND_L02_P002" (solid, remove dead copper, pour order 2): -92.118,57.75 -91.94,57.572 -25.164,57.572 -25.164,-4.607 -33.749,-13.192 -34.689,-12.252 -94.531,-12.252
no net on Bottom Layer "NONET_L02_P000" (solid, remove dead copper, pour order 0): -27.815,53.611
GND on Top Layer "GND_L01_P004" (solid, remove dead copper, pour order 4): -98.938,59.833 -29.596,59.833 -28.834,60.595 -27.818,59.579 -27.818,-14.335 -96.906,-14.335 -99.192,-12.049

## Keep-outs
Keep-Out Layer:
  the board outline again, w0.254

## Silkscreen, mask and mechanical layers (free items; w line width, h text height)
Top Overlay:
  lines w0.254: -3.366,14.543 -3.366,20.616 -2.044,20.616 -2.044,14.543 -3.366,14.543
  text "RST" at -2.212,17.822 h1.5 r90
  text "写字楼里写字间，写字间里程序员" at 6.678,12.488 h1.5 r90
  text "程序人员写程序，又拿程序换酒钱" at 8.377,12.488 h1.5 r90
  text "酒醒只在网上坐，酒醉还来网下眠" at 10.065,12.488 h1.5 r90
  text "酒醉酒醒日复日，网上网下年复年" at 11.758,12.488 h1.5 r90
  text "但愿老死电脑间，不愿鞠躬老板前" at 13.451,12.488 h1.5 r90
  text "别人笑我忒疯癫，我笑自己命太贱" at 15.145,12.488 h1.5 r90
  text "不见满街漂亮妹，哪个归得程序员?" at 16.838,12.488 h1.5 r90
  text "LED2" at -11.534,12.45 h1.5
  text "LED1" at -11.534,10.672 h1.5
  text "PWR" at 1.979,4.628 h1.5
  text "DartBoard" at -16.628,3.09 h2
Bottom Overlay:
  lines w0.254: -21.135,4.868 -21.135,19.727 -18.595,19.727 -18.595,4.868 -21.135,4.868 ; -17.579,0.042 -4.879,0.042 -4.879,3.979 -17.579,3.979 -17.579,0.042 ; -16.817,37.888 -16.817,44.238 -11.737,44.238 -11.737,37.888 -16.817,37.888 ; -10.467,37.888 -5.387,37.888 -5.387,44.238 -10.467,44.238 -10.467,37.888 ; 4.9,0.042 4.9,3.979 17.6,3.979 17.6,0.042 4.9,0.042 ; 5.535,39.285 10.615,39.285 10.615,44.238 5.535,44.238 5.535,39.285 ; 11.885,39.285 11.885,44.238 16.965,44.238 16.965,39.285 11.885,39.285 ; 18.604,4.106 21.144,4.106 21.144,12.361 18.604,12.361 18.604,4.106
  text "CH1" at -16.54,41.622 h1.27 r180
  text "CH2" at -14.074,41.622 h1.27 r180
  text "TX" at -9.894,41.622 h1.27 r180
  text "RX" at -7.386,41.622 h1.27 r180
  text "GND" at 5.614,41.622 h1.27 r180
  text "3.7V" at 8.216,41.616 h1.27 r180
  text "M+" at 12.435,41.622 h1.27 r180
  text "M-" at 15.104,41.622 h1.27 r180
  text "PA8" at -16.541,40.504 h1.27 r180
  text "PA9" at -14.001,40.504 h1.27 r180
  text "PB6" at -10.19,40.504 h1.27 r180
  text "PB7" at -7.65,40.51 h1.27 r180
  text "BAT" at 7.034,40.51 h1.27 r180
  text "MOTOR" at 12.372,40.51 h1.27 r180
  text "TIM1" at -15.442,39.185 h1.27 r180
  text "USART1" at -10.008,39.183 h1.27 r180
  text "V1.0 Beta" at 20.305,19.092 h1.27 r90
  text "3V3" at -18.891,18.66 h1.27
  text "GND" at -18.65,17.543 h1.27
  text "L" at 20.305,11.98 h1.27 r90
  text "H" at 20.305,10.301 h1.27 r90
  text "CLK" at -18.777,6.341 h1.27
  text "DIO" at -18.912,5.147 h1.27
  text "3V3" at -15.368,2.765 h1.27
  text "CTX" at -12.685,2.76 h1.27
  text "CRX" at -10.082,2.76 h1.27
  text "GND" at -7.507,2.76 h1.27
  text "CH1" at -5.165,2.76 h1.27
  text "CH1" at 7.175,2.76 h1.27
  text "GND" at 9.913,2.76 h1.27
  text "CRX" at 12.418,2.76 h1.27
  text "CTX" at 14.895,2.76 h1.27
  text "H" at 16.649,2.76 h1.27